# Altium PCB MCISO-B00-V00.PcbDoc
Units mil, origin at the board's own origin, x right, y up, seen from the top; angles counter-clockwise.
Board outline 2677.17 x 2755.91 mil, 2 copper layers (Top Layer, Bottom Layer), stack 61.8 mil thick; 70 components, 35 nets, 194 pads, 42 vias.
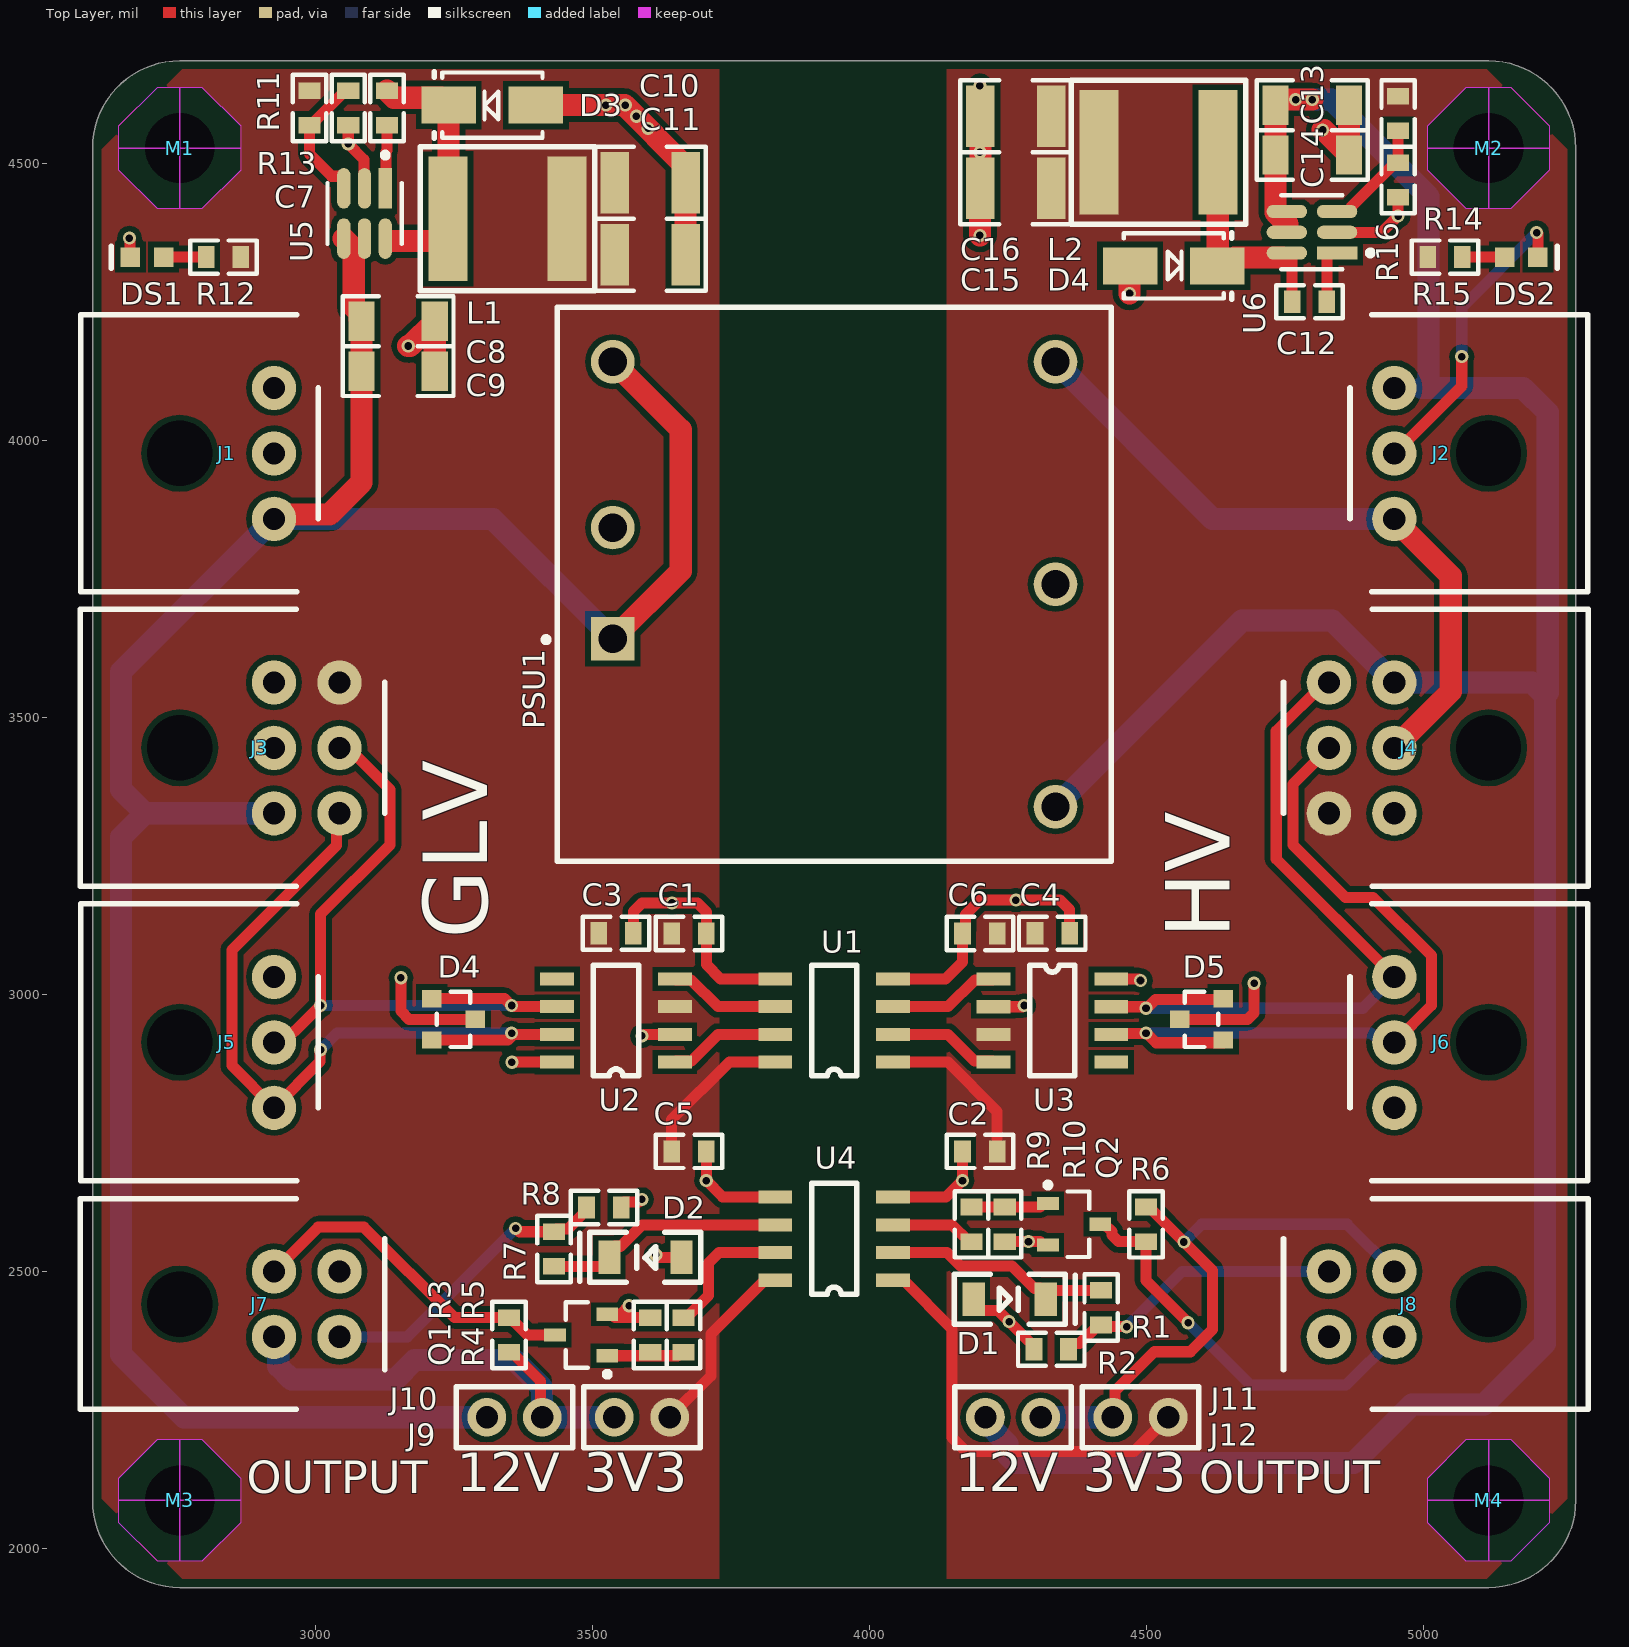
[diagram p0: Top Layer view]
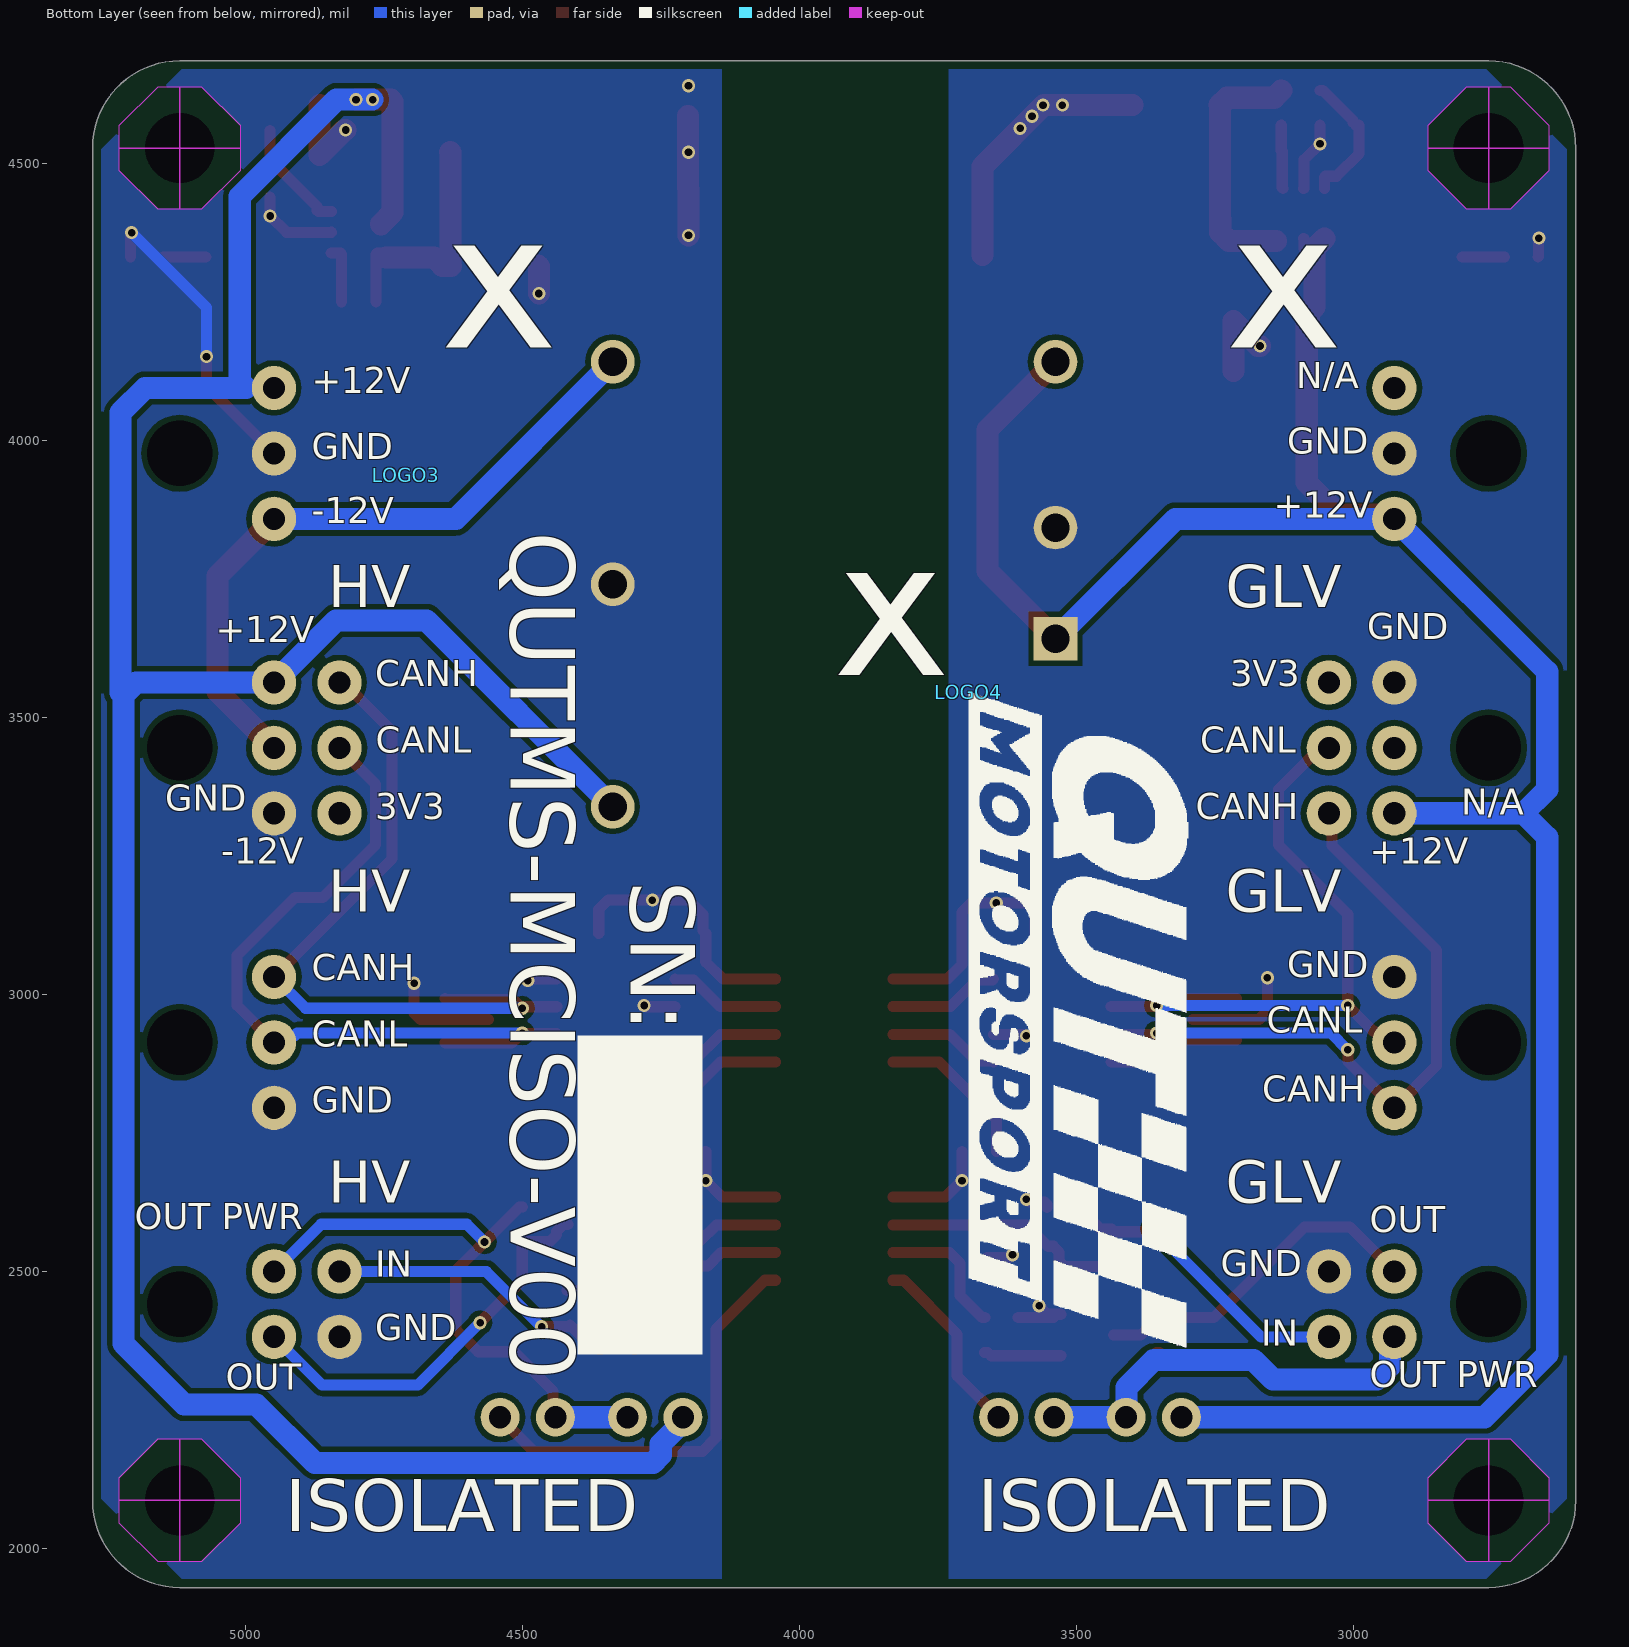
[diagram p1: Bottom Layer view, seen from below]
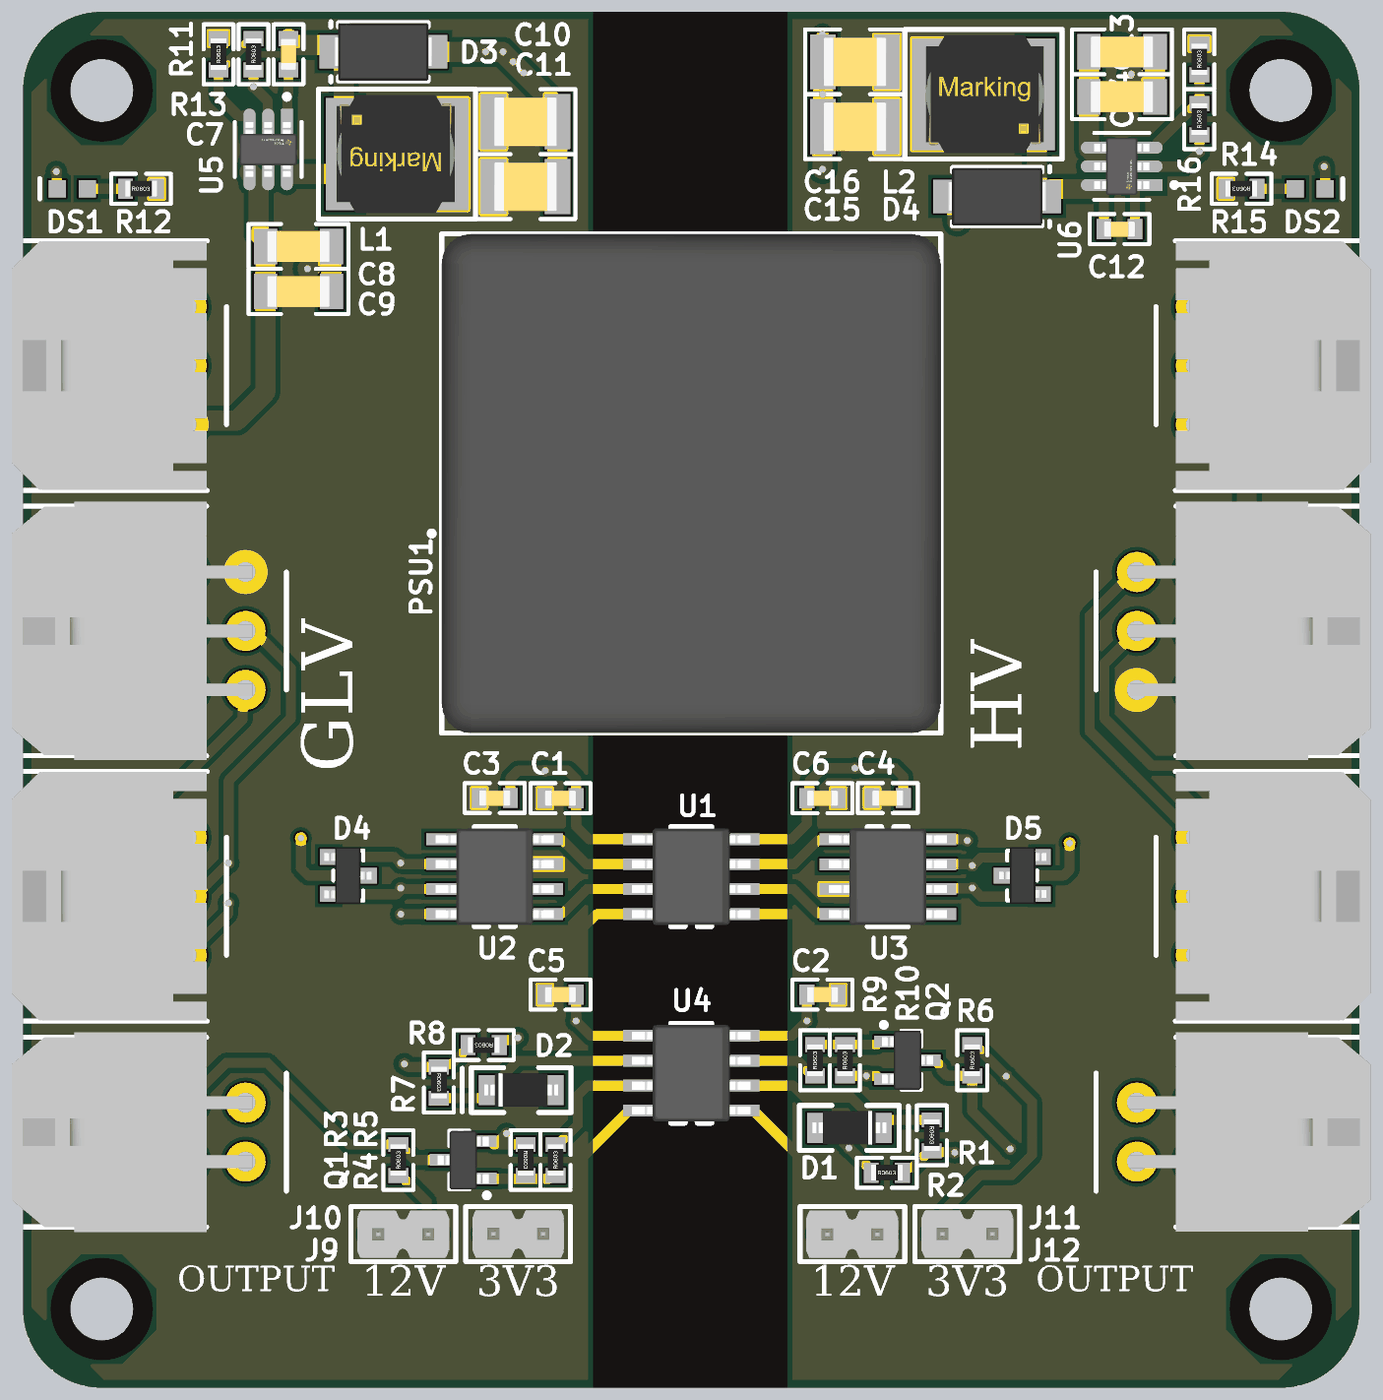
[diagram p2: 3D render of the assembled board from above, using the file's embedded part models]

## Layer stack, top to bottom
Top Solder: solder mask 0.4, Solder Resist, Dk 3.5
Top Layer: signal copper 1.4
Dielectric 1: core 59, Core-043, Dk 4.3
Bottom Layer: signal copper 1.4
Bottom Solder: solder mask 0.4, Solder Resist, Dk 3.5

## Board outline
2598.43,2086.61 ccw(c2755.91,2086.61) 2755.91,1929.13 5118.11,1929.13 ccw(c5118.11,2086.61) 5275.59,2086.61 5275.59,4527.56 ccw(c5118.11,4527.56) 5118.11,4685.04 2755.91,4685.04 ccw(c2755.91,4527.56) 2598.43,4527.56

## Design rules (kind name [scope] priority, off if disabled: settings)
Clearance [All] p1: gap=10 ignorepadtopadclearanceinfootprint=FALSE except(0: Arc-Hole Track-Hole SMDPad-Hole THPad-Hole Via-Hole Fill-Hole Poly-Hole Region-Hole Text-Hole)
PolygonConnect [All] p1: connectstyle=Direct reliefconductorwidth=10 reliefentries=4 polygonreliefangle="90 Angle" airgapwidth=10
RoutingVias [All] p1: holewidth=13.78 width=23.62 viastyle="Through Hole" minholewidth=13.78 minwidth=23.62 maxholewidth=13.78 maxwidth=23.62
SolderMaskExpansion [All] p1: expansion=4 istentingtop=FALSE
Width [All] p1: maxlimit=40 minlimit=10 preferedwidth=20 minimp=50.000000 maximp=50.000000 favimp=50.000000
30 further rules are at their usual default settings.

## Classes and differential pairs
component class MCISO-S00-V00-MotorcontrollerIsolation: C1 C2 C3 C4 C5 C6 D1 D2 D4 D5 J1 J2 J3 J4 J5 J6 J7 J8 J9 J10 J11 J12 LOGO1 LOGO4 M1 M2 M3 M4 PSU1 Q1 Q2 R1 R2 R3 R4 R5 R6 R7 R8 R9 R10 U1 U2 U3 U4

## Components (designator, comment, footprint, x,y, rotation, side; value= is the part's Value field where it differs from the comment)
C1 "100nF" Cap_Ceramic_0603 3675,3110 r180 top
C2 "100nF" Cap_Ceramic_0603 4200,2716.54 r180 top
C3 "100nF" Cap_Ceramic_0603 3543.31,3110.24 r0 top
C4 "100nF" Cap_Ceramic_0603 4330.71,3110.24 r180 top
C5 "100nF" Cap_Ceramic_0603 3675,2716.54 r180 top
C6 "100nF" Cap_Ceramic_0603 4200,3110 r180 top
C7 "100nF 100V" Cap_Ceramic_0603 3130,4600 r90 top
C8 "22uF 35V 1206" Cap_Ceramic_1206 3150,4215 r180 top
C9 "22uF 35V 1206" Cap_Ceramic_1206 3150,4125 r180 top
C10 "47uF 16V 1210" Cap_Ceramic_1210 3605,4465 r180 top
C11 "47uF 16V 1210" Cap_Ceramic_1210 3605,4335 r180 top
C12 "100nF 100V" Cap_Ceramic_0603 4795,4250 r180 top (schematic designator C7)
C13 "22uF 35V 1206" Cap_Ceramic_1206 4800,4605 r180 top (schematic designator C8)
C14 "22uF 35V 1206" Cap_Ceramic_1206 4800,4515 r180 top (schematic designator C9)
C15 "47uF 16V 1210" Cap_Ceramic_1210 4265,4455 r0 top (schematic designator C10)
C16 "47uF 16V 1210" Cap_Ceramic_1210 4265,4585 r0 top (schematic designator C11)
D1 "BZT52B3V3-G3-08" SOD123 4253.87,2449.51 r0 top
D2 "BZT52B3V3-G3-08" SOD123 3596.29,2525.33 r180 top
D3 "B260A-13-F" SMA 3320,4605 r180 top
D4 "NUP2105L" NUP2105L 3250,2955 r270 top
D4 "B260A-13-F" SMA 4550,4315 r0 top (schematic designator D2)
D5 "NUP2105L" NUP2105L 4600,2955 r90 top
DS1 "LED Green 0603" "LED GREEN 0603" 2696.85,4330.71 r180 top
DS2 "LED Green 0603" "LED GREEN 0603" 5177.17,4330.71 r0 top (schematic designator DS1)
J1 "Microfit 3.0 1x3" Microfit_1X3_R_TH 2755.91,3976.38 r270 top
J2 "Microfit 3.0 1x3" Microfit_1X3_R_TH 5118.11,3976.38 r90 top
J3 "Microfit 3.0 2x3" Microfit_2X3_R_TH 2755.91,3444.88 r270 top
J4 "Microfit 3.0 2x3" Microfit_2X3_R_TH 5118.11,3444.88 r90 top
J5 "Microfit 3.0 1x3" Microfit_1X3_R_TH 2755.91,2913.39 r270 top
J6 "Microfit 3.0 1x3" Microfit_1X3_R_TH 5118.11,2913.39 r90 top
J7 "Microfit 3.0 2x2" Microfit_2X2_R_TH 2755.91,2440.94 r270 top
J8 "Microfit 3.0 2x2" Microfit_2X2_R_TH 5118.11,2440.94 r90 top
J9 "Jumper 2Way Pins" Jumper_2Way_Pin 3410.16,2236.77 r0 top
J10 "Jumper 2Way Pins" Jumper_2Way_Pin 3540.16,2236.77 r180 top
J11 "Jumper 2Way Pins" Jumper_2Way_Pin 4310,2236.61 r0 top
J12 "Jumper 2Way Pins" Jumper_2Way_Pin 4440,2236.61 r180 top
L1 "74404064221" Inductor_6x6mm 3345,4400 r0 top
L2 "74404064221" Inductor_6x6mm 4525,4520 r180 top (schematic designator L1)
LOGO1 "LBL Hot Surface M" "LBL HOT MEDIUM" 5195,5155 r180 bottom
LOGO3 "LBL Hot Surface M" "LBL HOT MEDIUM" 4710,3937.01 r180 bottom
LOGO4 "30mm Wide QUTMS Logo" "QUTMS LOGO 30MM" 3695,3545 r270 bottom
M1 "Hole M3 Tight Unplated" "M3.2 UNPLATED" 2755.91,4527.56 r0 top
M2 "Hole M3 Tight Unplated" "M3.2 UNPLATED" 5118.11,4527.56 r0 top
M3 "Hole M3 Tight Unplated" "M3.2 UNPLATED" 2755.91,2086.61 r0 top
M4 "Hole M3 Tight Unplated" "M3.2 UNPLATED" 5118.11,2086.61 r0 top
PSU1 "PDQ30-Q24-D12-D" PDQ30-Q24-D12-D 3937.01,3740.16 r90 top
Q1 "2N7002" SOT23-3 3480.16,2385.16 r180 top
Q2 "2N7002" SOT23-3 4370,2585 r0 top
R1 "10k" Res_ThinFilm_0603 4418.87,2434.51 r270 top
R2 "DNF 0603" Res_ThinFilm_0603 4328.87,2359.51 r0 top
R3 "10k" Res_ThinFilm_0603 3350.16,2385.16 r90 top
R4 "1k" Res_ThinFilm_0603 3665.16,2385.16 r90 top
R5 "100R" Res_ThinFilm_0603 3605.16,2385.16 r270 top
R6 "10k" Res_ThinFilm_0603 4500,2585 r90 top
R7 "10k" Res_ThinFilm_0603 3431.29,2540.33 r270 top
R8 "DNF 0603" Res_ThinFilm_0603 3521.29,2615.33 r180 top
R9 "1k" Res_ThinFilm_0603 4185,2585 r90 top
R10 "100R" Res_ThinFilm_0603 4245,2585 r90 top
R11 "64k9 1%" Res_ThinFilm_0603 2990,4600 r90 top
R12 "1k" Res_ThinFilm_0603 2834.65,4330.71 r0 top
R13 "19k6 1%" Res_ThinFilm_0603 3060,4600 r90 top
R14 "64k9 1%" Res_ThinFilm_0603 4955,4590 r90 top (schematic designator R5)
R15 "1k" Res_ThinFilm_0603 5039.37,4330.71 r180 top (schematic designator R6)
R16 "19k6 1%" Res_ThinFilm_0603 4955,4470 r90 top (schematic designator R7)
U1 "Si8621BC-B-IS" Si8621BC-B-IS 3937.01,2952.76 r180 top
U2 "SN65HVD233" SN65HVD233DR 3543.31,2952.76 r180 top
U3 "SN65HVD233" SN65HVD233DR 4330.71,2952.76 r0 top
U4 "Si8621BC-B-IS" Si8621BC-B-IS 3937.01,2559.06 r180 top
U5 "LMR14010" LMR14010 3090,4410 r270 top
U6 "LMR14010" LMR14010 4800,4375 r180 top (schematic designator U5)

## Footprints (in the part's own frame and the unit in brackets; to place one, negate y for a bottom-side part, rotate by r counter-clockwise, add the part's x,y. Pads: shape width x height; smd on the part's side, far side on the other; paste and mask are expansions set on the pad)
Cap_Ceramic_0603 [mil]
  rect 30x40 smd: 1(-31.24,0) 2(31.24,0)
  silkscreen extent -60,-30 60,30, body extent -31,-16 32,16, height 33
Cap_Ceramic_1206 [mil]
  rect 47x71 smd: 1(-66.08,0) 2(66.08,0)
  silkscreen extent -100,-45 100,45, body extent -63,-31 63,32, height 53
Cap_Ceramic_1210 [mm]
  rect 1.3x2.8 smd: 1(-1.625,0) 2(1.625,0)
  silkscreen extent -2.54,-1.65 2.54,1.65, body extent -1.6,-1.25 1.6,1.25, height 1.35
Inductor_6x6mm [mm]
  rect 1.8x5.7 smd: 1(-2.667,0) 2(2.794,0)
  silkscreen extent -3.94,-3.3 4.06,3.3, body extent -3,-3 3,3, height 4.56
Jumper_2Way_Pin [mil]
  round 70 hole 40: 1(-100,0) 2(0,0)
  silkscreen extent -155,-55 55,55, body extent -142,-48 42,47, height 332
"LBL HOT MEDIUM" [mil]
"LED GREEN 0603" [mil]
  rect 35x35 smd: 1(-30,0) 2(30,0)
  silkscreen extent 65,-20 65,20, body extent -40,-20 40,20, height 30
LMR14010 [mil]
  rect 73.01x24.1 smd paste+0 mask+0: 1(-44.73,36.75)
  rrect100% 73.01x24.1 smd paste+0 mask+0: 2(-44.73,-0.65) 3(-44.73,-38.05) 4(45.84,-38.05) 5(45.84,-0.65) 6(45.84,36.75)
  silkscreen extent -110,-68 56,66, body extent -101,-77 102,76, height 10
"M3.2 UNPLATED" [mm]
  round 0 hole 3.2 unplated mask+2.6: 1(0,0)
  Keep-Out Layer pour cut-out: -2.794,0 -2.794,1.016 -1.016,2.794 0,2.794 0,0
  Keep-Out Layer pour cut-out: 0,2.794 1.016,2.794 2.794,1.016 2.794,0 0,0
  Keep-Out Layer pour cut-out: 2.794,0 2.794,-1.016 1.016,-2.794 0,-2.794 0,0
  Keep-Out Layer pour cut-out: 0,-2.794 -1.016,-2.794 -2.794,-1.016 -2.794,0 0,0
Microfit_1X3_R_TH [mil]
  round 80 hole 40: 1(118.11,170.08) 2(0,170.08) 3(-118.11,170.08)
  round 0 hole 118.11 mask+10: NC(0,0)
  silkscreen extent -250,-179 250,250, body extent -249,-180 249,210, height 223
Microfit_2X2_R_TH [mil]
  round 80 hole 40: 1(59.06,170) 2(-59.06,170) 3(59.06,288.19) 4(-59.06,288.19)
  round 0 hole 118.11 mask+10: NC(0,0)
  silkscreen extent -190,-180 190,370, body extent -200,-180 200,302, height 350
Microfit_2X3_R_TH [mil]
  round 80 hole 40: 1(118.11,170) 2(0,170) 3(-118.11,170) 4(118.11,288.19) 5(0,288.19) 6(-118.11,288.19)
  round 0 hole 118.11 mask+10: NC(0,0)
  silkscreen extent -250,-180 250,370, body extent -259,-180 259,302, height 350
NUP2105L [mm]
  rect 0.8x0.9 smd: 1(-0.95,-1) 2(0.95,-1) 3(0,1)
  silkscreen extent -1.27,-0.76 1.27,0.76, body extent -1.45,-1.22 1.45,1.18, height 1
PDQ30-Q24-D12-D [mm]
  rect 2x2 hole 1.3: 1(-2.5,10.15)
  round 2 hole 1.3: 2(2.6,10.15) 3(-10.2,-10.15) 4(0,-10.15) 5(10.2,-10.15) 6(10.2,10.15)
  silkscreen extent -12.7,-12.7 12.7,13.33, body extent -12.7,-12.7 12.7,12.7, height 10.2
"QUTMS LOGO 30MM" [mil]
  silkscreen extent -1,1 1182,398
Res_ThinFilm_0603 [mil]
  rect 30x40 smd: 1(-31.24,0) 2(31.24,0)
  silkscreen extent -60,-30 60,30, body extent -31,-16 32,16, height 18
Si8621BC-B-IS [mm]
  rect 1.55x0.6 smd: 1(-2.7,1.905) 2(-2.7,0.635) 3(-2.7,-0.635) 4(-2.7,-1.905) 5(2.7,-1.905) 6(2.7,-0.635) 7(2.7,0.635) 8(2.7,1.905)
  silkscreen extent -1.04,-2.54 1.04,2.54, body extent -3.01,-2.45 3.01,2.45, height 1.63
SMA [mm]
  rect 2.5x1.7 smd: A(-2,0) K(2,0)
  silkscreen extent -2.3,-1.52 2.67,1.52, body extent -2.52,-1.46 2.52,1.46, height 2.4
SN65HVD233DR [mm]
  rect 1.55x0.6 smd: 1(-2.7,1.903) 2(-2.7,0.633) 3(-2.7,-0.637) 4(-2.7,-1.907) 5(2.7,-1.907) 6(2.7,-0.637) 7(2.7,0.633) 8(2.7,1.903)
  silkscreen extent -1.04,-2.54 1.04,2.54, body extent -3.01,-2.45 3.01,2.45, height 1.63
SOD123 [mil]
  rect 40x60 smd: A(-65,0) K(65,0)
  silkscreen extent -100,-45 118,45, body extent -74,-33 74,33, height 47
SOT23-3 [mm] "SOT23, 3-Leads, Body 2.90x2.45mm, Pitch 0.95mm, IPC Medium Density"
  rect 1x0.6 smd: D(1.2,0) G(-1.2,0.95) S(-1.2,-0.95)
  silkscreen extent -1.33,-1.5 0.7,1.92, body extent -1.3,-1.5 1.3,1.5, height 1.1

## Part data
C1 C2 C3 C4 C5 C6: library part "100nF 50V 5% X7R 0603", "Capacitor, Ceramic, SMD, 100nF, 50V, 5%, X7R, 0603"
C7 C12: library part "100nF 100V 5% X7R 0603", "Capacitor, Ceramic, SMD, 100nF, 100V, 5%, X7R, 0603"
C8 C9 C13 C14: library part "22uF 35V 10% X7R 1206", "Capacitor, Ceramic, SMD, 22uF, 35V, 10%, X7R, 1206"
C10 C11 C15 C16: library part "47uF 16V 10% X7R 1210", "Capacitor, Ceramic, SMD, 47uF, 16V, 5%, X7R, 1210"
D1 D2: "Diode, SMD, Zenner, 3.3V, 2%, 410mW, SOD-123", ComponentLink1Description=Digikey, ComponentLink1URL=https://www.digikey.com.au/product-detail/en/vishay-semiconductor-diodes-division/BZT52B3V3-G3-08/BZT52B3V3-G3-08GICT-ND/8284035, ComponentLink2Description=Datasheet, ComponentLink2URL=https://www.vishay.com/docs/83340/bzt52g.pdf
D3 D4: "Diode, Schottky Barrier Rectifier, 60 V, 2 A, B260A-13-F"
J1 J2 J5 J6: library part Microfit_1x3
J3 J4: library part Microfit_2x3
J7 J8: library part Microfit_2x2
J9 J10 J11 J12: library part "Jumper 2Way Vert Pins", "Jumper 2Way Vert Pins"
L1 L2: "FIXED IND 220UH 660MA 850 MOHM", ComponentLink1Description=Digikey, ComponentLink1URL=https://www.digikey.com.au/product-detail/en/w%C3%BCrth-elektronik/74404064221/732-7261-1-ND/5353241, ComponentLink2Description="LCSC A", ComponentLink2URL=https://lcsc.com/product-detail/Power-Inductors_Sunlord-SWPA6045S221MT_C91047.html, ComponentLink3Description="LCSC B", ComponentLink3URL=https://lcsc.com/product-detail/Power-Inductors_SXN-Shun-Xiang-Nuo-Elec-SMNR6045-221MT_C467145.html
LOGO4: library part "QUTMS Logo 30mm"
M1 M2 M3 M4: "M3.2 Hole, No Plating"
R1 R3 R6 R7: library part "10k 5% 0603", "Resistor, SMD, 10k, 0.1W, 5%, 0603"
R2 R8: "Resistor, SMD, DNF, 0.1W, 0603"
R4 R9 R12 R15: library part "1k 5% 0603", "Resistor, SMD, 1k, 0.1W, 5%, 0603"
R5 R10: library part "100R 5%, 0603", "Resistor, SMD, 100R, 0.1W, 5%, 0603"
R11 R14: library part "64k9 1% 0603", "Resistor, SMD, 64k9, 0.1W, 5%, 0603"
R13 R16: library part "19k6 1% 0603", "Resistor, SMD, 19k6, 0.1W, 5%, 0603"
D4 D5: ComponentLink1Description=Datasheet, ComponentLink1URL=https://www.onsemi.cn/PowerSolutions/document/NUP2105L-D.PDF, ComponentLink2Description=LCSC, ComponentLink2URL=https://lcsc.com/product-detail/TVS_ON-Semiconductor-NUP2105LT1G_C14486.html, ComponentLink3Description=Digikey, ComponentLink3URL=https://www.digikey.com.au/product-detail/en/on-semiconductor/SZNUP2105LT1G/SZNUP2105LT1GOSCT-ND/3487669
U1 U4: ComponentLink1Description=Digikey, ComponentLink1URL=https://www.digikey.com.au/product-detail/en/silicon-labs/SI8621BC-B-ISR/336-4774-1-ND/8611005, ComponentLink2Description=Datasheet, ComponentLink2URL=https://www.silabs.com/documents/public/data-sheets/si861x-2x-datasheet.pdf
U2 U3: ComponentLink1Description=LCSC, ComponentLink1URL=https://lcsc.com/product-detail/CAN-ICs_Texas-Instruments_SN65HVD233DRG4_Texas-Instruments-Texas-Instruments-SN65HVD233DRG4_C61643.html, ComponentLink2Description=Digikey, ComponentLink2URL=https://www.digikey.com.au/product-detail/en/texas-instruments/SN65HVD233DR/296-35967-1-ND/4134960, ComponentLink3Description=Datasheet, ComponentLink3URL=https://www.ti.com/lit/ds/symlink/sn65hvd233.pdf?ts=1588560888178, ComponentLink4Description="Ti Product Page", ComponentLink4URL=https://www.ti.com/product/SN65HVD233

## Via types
v1: diameter 23.62, hole 13.78, Top Layer to Bottom Layer, tented both sides, 40 vias
v2: diameter 23.62, hole 13.78, Top Layer to Bottom Layer, 2 vias

## Nets (pads, with @x,y where several pads share a name; then routed paths per layer and width w, separated by ;. In a path a pad name is that pad's centre, name@x,y a point inside that pad or via, vN(x,y) a via of type N, cw(c..) or ccw(c..) an arc to the next point about the centre after c; other vN are vias at no path point)
3V3: C1.2 C3.1 C5.2 C10.2 C11.2 J3.6 J10.1 L1.2 R11.2 R12.2 U1.8 U2.3 U4.8 | length 624.4
  Top Layer w20: J10.1 3715,2311.61 3715,2387.06 3811.99,2484.06 U4.8 ; C5.2 3643.76,2773.76 3747.76,2877.76 U1.8
"3V3 L": DS1.1 R12.1 | length 76.6
  Top Layer w20: DS1.1 R12.1
"3V3 L ISO": DS2.1 R15.1 | length 76.6
  Top Layer w20: R15.1 DS2.1
+12V: C8.2 C9.2 J1.1 J3.1 J9.1 PSU1.1 PSU1.6 U5.4 U5.5 | length 4557.8
  Top Layer w20: U5.5@3088.56,4346.1 3088.56,4363.37 U5.5
  Top Layer w40: J1.1 2933.64,3865.92 3025.92,3865.92 3083.92,3923.92 C9.2 C8.2 3080.42,4218.5 3080.42,4230.5 3070,4240.92 3070,4346.1 U5.4 ; PSU1.1 3660,3764.33 3660,4019.13 PSU1.6
  Bottom Layer w40: J3.1 2693.23,3326.77 ; J9.1 2763.23,2236.77 2650,2350 2650,3283.54 2693.23,3326.77 ; PSU1.1 3320.87,3858.27 J1.1 2650,3582.28 2650,3370 2693.23,3326.77
"CAN RX": U1.6 U2.4 | length 201.8
  Top Layer w20: U2.4 3651.4,3026.01 3678.99,3026.01 3727.24,2977.76 U1.6
"CAN RX ISO": U1.2 U3.4 | length 201.9
  Top Layer w20: U1.2 4142.24,2927.76 4190.5,2879.5 4222.62,2879.5 U3.4
"CAN TX": U1.7 U2.1 | length 201.8
  Top Layer w20: U2.1 3651.4,2879.64 3679.64,2879.64 3727.76,2927.76 U1.7
"CAN TX ISO": U1.3 U3.1 | length 201.8
  Top Layer w20: U1.3 4142.76,2977.76 4190.88,3025.88 4222.62,3025.88 U3.1
CANH: D4.2 J3.4 J5.1 U2.7 | length 1370.9
  Top Layer w20: v1(3010,2900) 3009.31,2899.31 3009.31,2878.6 J5.1 2850,2871.26 2850,3080 3038.44,3268.44 3038.44,3321.11 J3.4 ; D4.2 3347.93,2917.6 3358.16,2927.82 U2.7
  Bottom Layer w20: v1(3010,2900) 3040,2930 v1(3355,2930)
"CANH ISO": D5.2 J4.4 J6.1 U3.7 | length 1341.8
  Top Layer w20: U3.7 v1@4496.33,2977.69 ; v1@4498.33,2975.69 4501.67,2975.69 4516.73,2990.75 4637.72,2990.75 D5.2 ; J4.4 4822.99,3562.99 4735,3475 4735,3244.53 J6.1
  Bottom Layer w20: v1(4500,2975) 4891.54,2975 J6.1
CANL: D4.1 J3.5 J5.2 U2.6 | length 1252.7
  Top Layer w20: J5.2 2942.22,2913.39 2963.02,2934.18 2964.18,2934.18 v1(3010,2980) 3010,3145 3135,3270 3135,3370 3060.12,3444.88 J3.5 ; D4.1 3341.62,2992.4 3354.02,2980 v1(3355,2980) 3355.98,2980 3358.16,2977.82 U2.6
  Bottom Layer w20: v1(3010,2980) v1(3355,2980)
"CANL ISO": D5.1 J4.5 J6.2 U3.6 | length 1384.4
  Top Layer w20: U3.6 4438.65,2929.31 4499.31,2929.31 v1(4500,2930) 4500.98,2930 4518.38,2912.6 D5.1@4639.37,2912.6 ; J4.5 4765,3379.96 4765,3270 4860,3175 4910,3175 5015,3070 5015,2980.35 J6.2
  Bottom Layer w20: v1(4500,2930) 4906.32,2930 4911.45,2924.87 4936.55,2924.87 J6.2
GND: C1.1 C3.2 C5.1 C8.1 C9.1 C10.1 C11.1 D2.A D3.A D4.3 DS1.2 J1.2 J3.3 J5.3 J7.4 PSU1.2 Q1.S R5.1 R8.1 R13.1 U1.5 U2.2 U2.8 U4.5 U5.2 | length 1953.3
  Top Layer w20: v1(2665,4365) 2665.69,4364.31 2665.69,4331.87 DS1.2 ; R13.1 v1(3060,4535) 3088.56,4506.44 3088.56,4455.52 U5.2 ; v2(3155,3030) 3155,2970 3170,2955 D4.3 ; v1(3355.21,2877.53) 3355.5,2877.82 U2.8 ; Q1.S Q1.S@3535.28,2422.56 ; R8.1 3552.53,2620.33 3557.53,2625.33 3584.35,2625.33 3589.02,2630 v1(3590,2630) ; v1(3566.97,2438.03) 3551.5,2422.56 Q1.S@3535.28,2422.56 ; C3.2 3574.54,3149.54 3590,3165 v1(3644.37,3165) 3690,3165 3706.24,3148.76 3706.24,3053.76 3732.24,3027.76 U1.5 ; v1(3590,2925) 3590.98,2925 3593.8,2927.82 U2.2 ; R5.1 3541.44,2416.39 Q1.S@3535.28,2422.56 ; v1(3615,2530) 3619.67,2525.33 D2.A ; C5.1 v1(3706.24,2663.76) 3735.94,2634.06 U4.5
  Top Layer w40: v1(3168.28,4170.29) 3171.38,4170.29 C8.1 C9.1 ; D3.A 3558.52,4605 3668.99,4494.53 C10.1 C11.1
  other v1: 3601.38,4562.98 3580,4585 3525,4605 3560,4605
IN: J7.3 R7.1 R8.2 | length 550.5
  Top Layer w20: v1(3362.12,2577.55) 3363.1,2577.55 3369.07,2571.57 R7.1 3436.29,2576.57 3456.29,2576.57 3490.05,2610.33 R8.2
  Bottom Layer w20: J7.3 3166.46,2381.89 v1(3362.12,2577.55)
"IN CLAMP": D2.K R7.2 U4.6 | length 440
  Top Layer w20: R7.2 3521.29,2509.1 3531.29,2519.1 D2.K 3531.29,2535.33 3541.29,2545.33 3551.29,2545.33 3590.01,2584.06 U4.6
"IN CLAMP ISO": D1.K R1.1 U4.2 | length 409
  Top Layer w20: U4.2 4140.94,2534.06 4165,2510 4258.38,2510 4298.87,2469.51 4308.87,2469.51 4318.87,2459.51 4325.1,2465.75 R1.1
"IN ISO": J8.3 R1.2 R2.2 | length 533.7
  Top Layer w20: R2.2 4360.1,2364.51 4365.1,2369.51 4380.1,2369.51 4413.87,2403.27 4416.45,2400.69 4464.31,2400.69 v1(4465,2400)
  Bottom Layer w20: v1(4465,2400) 4565,2500 J8.3
"ISO 3V3": C2.1 C4.2 C6.1 C15.2 C16.2 J4.6 J12.1 L2.2 R14.2 R15.2 U1.1 U3.3 U4.1 | length 1062.1
  Top Layer w20: U4.1 4061.99,2484.06 4150,2396.05 4150,2200 4175,2175 4478.39,2175 J12.1 ; U1.1 4142.24,2877.76 4231.24,2788.76 C2.1
"ISO +12V": C13.2 C14.2 J2.1 J4.1 J11.1 PSU1.3 U6.4 U6.5 | length 5116.4
  Top Layer w40: 4755,4390 4733.92,4411.08 C14.2 C13.2 4733.92,4611.5 4737.42,4615 v1(4770,4615) v1(4800,4615)
  Bottom Layer w40: J11.1 4210,2228.5 4250,2188.5 4250,2168.43 4264.19,2154.24 4874.24,2154.24 4980,2260 5110,2260 5220,2370 5220,3539.56 ; PSU1.3 4673.03,3675 4836.1,3675 J4.1 5196.57,3562.99 5220,3539.56 ; v1(4770,4615) v1(4800,4615) 4835,4615 5010,4440 5010,4106.03 4998.46,4094.49 5180.51,4094.49 5225,4050 5225,3544.56 5220,3539.56
"ISO -12V": J2.3 J4.2 PSU1.5 | length 1226.7
  Top Layer w40: J2.3 4948.03,3856.97 5050,3755 5050,3546.77 J4.2
  Bottom Layer w40: PSU1.5 4620.08,3858.27 J2.3
"ISO GND": C2.2 C4.1 C6.2 C13.1 C14.1 C15.1 C16.1 D1.A D4.A D5.3 DS2.2 J2.2 J4.3 J6.3 J8.4 PSU1.4 Q2.S R2.1 R10.1 R16.1 U1.4 U3.2 U3.8 U4.4 U6.2 | length 2332.1
  Top Layer w20: U4.4 4139.06,2634.06 v1(4168.76,2663.76) C2.2 ; U1.4 4137.76,3027.76 4168.76,3058.76 C6.2 4173.76,3115 4173.76,3143.76 4200,3170 v1(4265,3170) 4345,3170 4361.94,3153.06 C4.1 ; D1.A 4188.87,2439.51 4198.87,2429.51 4232.63,2429.51 v1(4252.82,2409.32) 4297.63,2364.51 R2.1 ; U3.2 4276.71,2977.69 4279.02,2980 v1(4280,2980) ; R10.1 v1(4287.83,2553.76) 4308.72,2553.76 4314.88,2547.6 Q2.S ; U3.8 4487.31,3027.69 v1(4490,3025) ; D5.3 4683.28,2955 4695,2966.72 v2(4695,3020) ; U6.2 4845.38,4375 4925,4375 v1(4955,4405) R16.1 ; J2.2 5069.88,4098.22 v1(5069.88,4151.17) ; v1(5205,4375) 5207.17,4372.83 DS2.2
  Top Layer w40: v1(4200,4370) 4200,4453.99 C15.1 C16.1 ; v1(4470,4265) 4470,4313.74 D4.A ; v1(4818.75,4560.19) 4820.89,4560.19 C14.1 C13.1
  Bottom Layer w20: v1(5069.88,4151.17) 5069.88,4239.88 v1(5205,4375)
  other v1: 4200,4520 4200,4640
NetQ1_G: Q1.G R4.1 R5.2 | length 140.3
  Top Layer w20: Q1.G 3653.99,2347.76 3660.16,2353.92 R4.1
NetQ2_G: Q2.G R9.2 R10.2 | length 140.3
  Top Layer w20: R9.2 R10.2 4308.72,2616.24 4314.88,2622.4 Q2.G
OUT: J7.2 Q1.D R3.2 | length 622.7
  Top Layer w20: J7.2 3005.91,2580 3087.9,2580 3251.5,2416.39 R3.2 3355.16,2416.39 3360.16,2411.39 3360.16,2408.23 3383.23,2385.16 Q1.D
"OUT CTRL": R4.2 U4.7 | length 248.7
  Top Layer w20: R4.2 3670.16,2416.39 3710,2456.24 3710,2515 3729.06,2534.06 U4.7
"OUT ISO": J8.2 Q2.D R6.1 | length 731.9
  Top Layer w20: Q2.D 4425.12,2585 4438.28,2571.83 4438.28,2565.48 4450,2553.76 R6.1 4500,2483.39 v1(4576.05,2407.34)
  Bottom Layer w20: v1(4576.05,2407.34) 4688.39,2295 4861.22,2295 J8.2
"OUT ISO CTRL": R9.1 U4.3 | length 154.3
  Top Layer w20: U4.3 4149.71,2584.06 4180,2553.76 R9.1
"OUT PWR": J7.1 J9.2 J10.2 R3.1 | length 910.4
  Top Layer w20: R3.1 3355.16,2353.92 3407.31,2301.77 3407.31,2239.62 J9.2
  Bottom Layer w40: J7.1 2933.56,2374.24 2933.56,2328.74 2957.3,2305 3145,2305 3180,2340 3360,2340 3409.52,2290.48 3409.52,2237.41 J9.2 ; J9.2@3405.81,2236.77 J9.2 ; J10.2 J9.2
"OUT PWR ISO": J8.1 J11.2 J12.2 R6.2 | length 1103.3
  Top Layer w20: J12.2 4444.27,2240.88 4444.27,2284.27 4515,2355 4580,2355 4620,2395 4620,2501.24 v1(4568.12,2553.12) 4505,2616.24 R6.2
  Bottom Layer w20: v1(4568.12,2553.12) 4600,2585 4863.11,2585 J8.1
  Bottom Layer w40: J11.2 J12.2
"PWR CB": C7.1 U5.1 | length 115.4
  Top Layer w20: U5.1 3128.14,4456.12 3128.14,4521.24 3130,4523.1 C7.1
"PWR CB ISO": C12.1 U6.1 | length 105.5
  Top Layer w20: C12.1 4826.24,4336.2 4828.29,4338.25 U6.1
"PWR FB": R11.1 R13.2 U5.3 | length 248.8
  Top Layer w20: U5.3 3051.95,4474.8 3050.05,4476.69 3029.99,4476.69 2990,4516.68 R11.1 2995,4568.76 3000,4573.76 3000,4576.24 3055,4631.24 R13.2
"PWR FB ISO": R14.1 R16.2 U6.3 | length 208
  Top Layer w20: U6.3 4868.08,4413.05 4869.97,4414.95 4869.97,4421.21 4907.49,4458.72 4950,4501.24 R16.2 R14.1
"PWR SW": C7.2 D3.K L1.1 U5.6 | length 498.1
  Top Layer w20: D3.K@3212.05,4618.46 D3.K@3240,4590.51
  Top Layer w40: C7.2 3142.77,4618.46 3212.05,4618.46 3227.8,4618.46 D3.K 3240.63,4604.37 3240.63,4400.63 L1.1 3240,4375.43 3224.57,4360 3140,4360
"PWR SW ISO": C12.2 D4.K L2.1 U6.6 | length 426.1
  Top Layer w20: U6.6 4761.87,4338.25 4763.76,4336.36 C12.2
  Top Layer w40: L2.1 4629.37,4519.37 4629.37,4315.63 D4.K 4644.49,4315 4659.79,4330.3 U6.6@4746.21,4330.3
pads on no net: J1.3 J1.NC J2.NC J3.2 J3.NC J4.NC J5.NC J6.NC J7.NC J8.NC M1.1 M2.1 M3.1 M4.1 U2.5 U3.5

## Polygon pours and split planes (outlines as drawn)
"ISO GND" on Bottom Layer "NONET_L01_P-001" (solid, pour order 1): 4140,1945 5115,1945 5260,2090 5260,4525 5115,4670 4140,4670
GND on Bottom Layer "NONET_L01_P-001" (solid, pour order 2): 3730,4670 3730,1945 2760,1945 2615,2090 2615,4525 2760,4670
"ISO 3V3" on Top Layer "NONET_L01_P-001" (solid, pour order 5): 4140,1945 5115,1945 5260,2090 5260,4525 5115,4670 4140,4670
3V3 on Top Layer "NONET_L01_P-001" (solid, pour order 4): 3730,4670 3730,1945 2760,1945 2615,2090 2615,4525 2760,4670
no net on Top Solder "NONET_L01_P-001" (solid, pour order 0): 3740,4690 4130,4690 4130,1925 3740,1925
no net on Bottom Solder "NONET_L01_P-001" (solid): 3740,4690 4130,4690 4130,1925 3740,1925
no net on Bottom Overlay "NONET_L01_P-001" (solid): 4175,2925 4400,2925 4400,2350 4175,2350

## Other copper
Top Layer:
  pour cut-out: 3740,4690 4130,4690 4130,1925 3740,1925
Bottom Layer:
  pour cut-out: 3740,4690 4130,4690 4130,1925 3740,1925

## Silkscreen, mask and mechanical layers (free items; w line width, h text height)
Top Overlay:
  text "GLV" at 3350,3100 h200 r90
  text "HV" at 4689.47,3100 h200 r90
  text "OUTPUT" at 2876.41,2079.5 h100
  text "12V" at 3255.39,2080 h120
  text "3V3" at 3485.39,2080 h120
  text "12V" at 4155.39,2080 h120
  text "3V3" at 4385.39,2080 h120
  text "OUTPUT" at 4596.41,2079.5 h100
Bottom Overlay:
  text "N/A" at 3102.59,4079.07 h80
  text "+12V" at 4879.6,4069.83 h80
  text "x" at 3018.92,4054.98 h590.55
  text "x" at 4436.24,4054.98 h590.55
  text "GND" at 3119.28,3960.67 h80
  text "GND" at 4880,3950.67 h80
  text "+12V" at 3143.14,3845 h80
  text "QUTMS-MCISO-V00" at 4559.56,3835 h200 r90
  text "-12V" at 4880,3835 h80
  text "GLV" at 3230.49,3673.75 h130
  text "HV" at 4850,3673.75 h130
  text "GND" at 2975,3625.67 h80
  text "+12V" at 5053.14,3620 h80
  text "3V3" at 3222.37,3540.67 h80
  text "CANH" at 4764.96,3540.67 h80
  text "x" at 3727.58,3464.43 h590.55
  text "CANL" at 3276.28,3420.67 h80
  text "CANL" at 4764.6,3420.49 h80
  text "GND" at 5144.28,3315.67 h80
  text "N/A" at 2805,3309.07 h80
  text "CANH" at 3284.16,3300.67 h80
  text "3V3" at 4765,3300.67 h80
  text "+12V" at 2969.96,3220 h80
  text "-12V" at 5042.82,3220 h80
  text "SN:" at 4343.34,3204.91 h200 r90
  text "GLV" at 3230.49,3123.75 h130
  text "HV" at 4850,3123.75 h130
  text "GND" at 3119.28,3015.67 h80
  text "CANH" at 4879.6,3010.49 h80
  text "CANL" at 3156.28,2915.67 h80
  text "CANL" at 4879.6,2890.49 h80
  text "CANH" at 3164.16,2790.67 h80
  text "GND" at 4879.64,2770.67 h80
  text "GLV" at 3230.49,2598.75 h130
  text "HV" at 4850,2598.75 h130
  text "OUT PWR" at 5199.72,2560.67 h80
  text "OUT" at 2969.96,2555.67 h80
  text "GND" at 3239.28,2475.67 h80
  text "IN" at 4765,2475 h80
  text "GND" at 4765,2360.67 h80
  text "IN" at 3165.87,2350 h80
  text "OUT PWR" at 2969.96,2275.67 h80
  text "OUT" at 5035.06,2270.67 h80
  text "ISOLATED" at 3677.5,2000 h160
  text "ISOLATED" at 4927.5,2000 h160
Mechanical 1:
  the board outline again, w10